# EAGLE board xmegaproto (EAGLE 5.07)
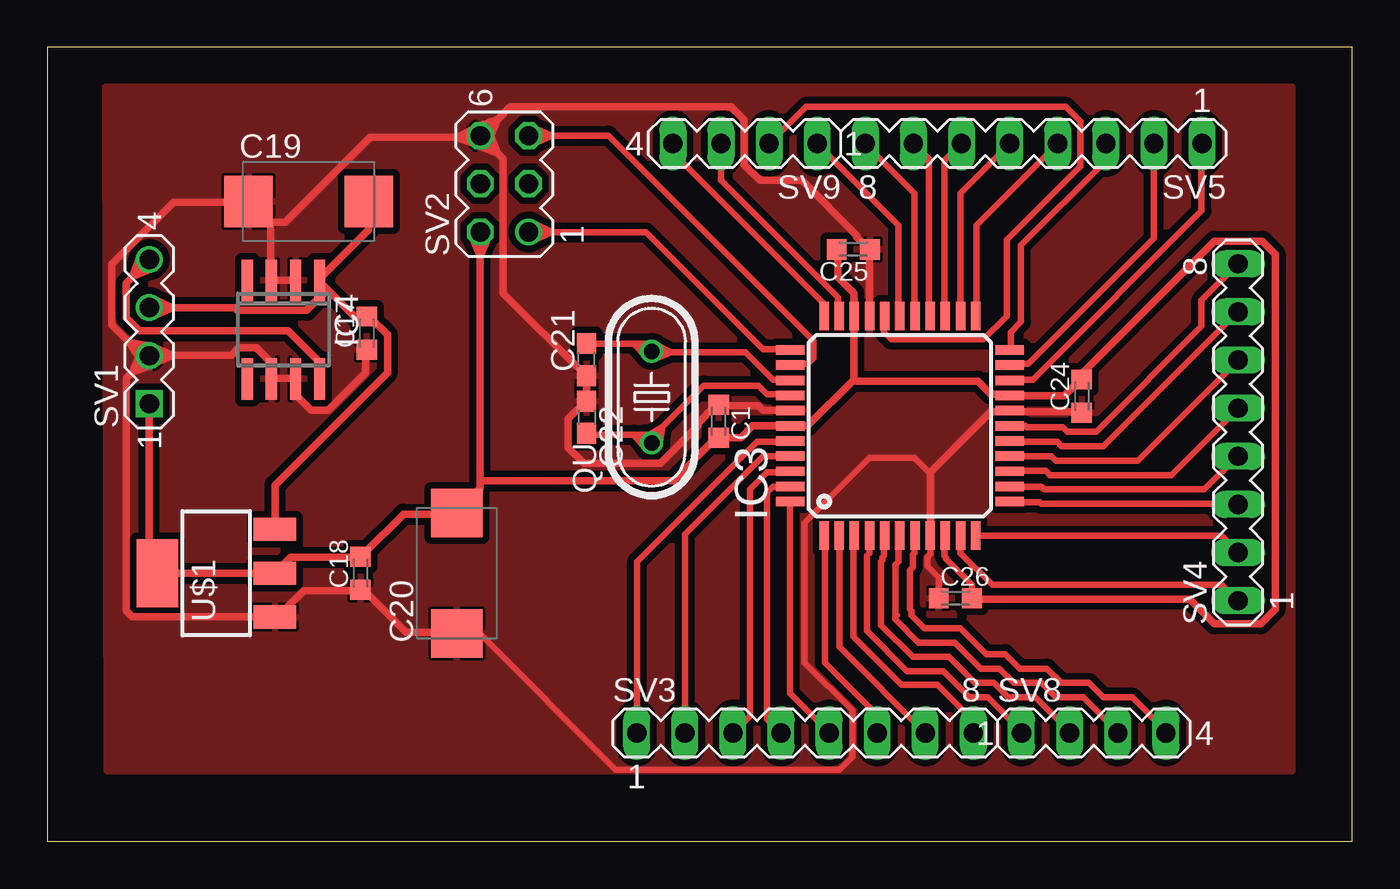
[diagram p0: board, top side]

Size 68.89 x 41.9 mm. Coordinates in mm from the lower left corner, seen from the top.
Outline: 0,0 68.89,0 68.89,41.9 0,41.9 0,0
Copper layers (1*16): Top 0.035mm / dielectric 1.5mm / Bottom 0.035mm
Design rules "hand-Ã¤tzung *": minimum track width 14mil, minimum drill 0.3mm, track to track 14mil, track to pad 11mil, pad to pad 11mil, via to via 14mil, smd to smd 0mil, copper to edge 14mil, drill to drill 14mil, minimum pad ring 0.2mm, minimum via ring 0.15mm, stop-mask expansion 0.15mm, vias tented up to drill 0.5mm, thermal gap 0.15mm
Net classes: 1 Hi-Power: width 1.524 mm; 2 Lo-Power: width 0.406 mm
vRestrict: area 15.2,47.6 to 17.1,49.5

## Footprints (pad centres in the part's own frame; a part is rotated, then mirrored left to right if it is on the bottom)
C0603K = smd 1.05 x 1.08: 1 -0.875,0; 2 0.875,0
D/7343-31R = smd 2.55 x 2.7: + 3.175,0; - -3.175,0
C0603 = smd 1.1 x 1: 1 -0.85,0; 2 0.85,0
TQFP44 = smd 1.5 x 0.5: 1 -5.8,4; 2 -5.8,3.2; 3 -5.8,2.4; 4 -5.8,1.6; 5 -5.8,0.8; 6 -5.8,0; 7 -5.8,-0.8; 8 -5.8,-1.6; 9 -5.8,-2.4; 10 -5.8,-3.2; 11 -5.8,-4; 23 5.8,-4; 24 5.8,-3.2; 25 5.8,-2.4; 26 5.8,-1.6; 27 5.8,-0.8; 28 5.8,0; 29 5.8,0.8; 30 5.8,1.6; 31 5.8,2.4; 32 5.8,3.2; 33 5.8,4 | smd 0.5 x 1.5: 12 -4,-5.8; 13 -3.2,-5.8; 14 -2.4,-5.8; 15 -1.6,-5.8; 16 -0.8,-5.8; 17 0,-5.8; 18 0.8,-5.8; 19 1.6,-5.8; 20 2.4,-5.8; 21 3.2,-5.8; 22 4,-5.8; 34 4,5.8; 35 3.2,5.8; 36 2.4,5.8; 37 1.6,5.8; 38 0.8,5.8; 39 0,5.8; 40 -0.8,5.8; 41 -1.6,5.8; 42 -2.4,5.8; 43 -3.2,5.8; 44 -4,5.8
SO08 = smd 0.6 x 2.2: 1 -1.905,-2.6; 2 -0.635,-2.6; 3 0.635,-2.6; 4 1.905,-2.6; 5 1.905,2.6; 6 0.635,2.6; 7 -0.635,2.6; 8 -1.905,2.6
HC49U-V = drill 0.813 round: 1 -2.413,0; 2 2.413,0
MA04-1 = drill 1.016 square: 1 -3.81,0 | drill 1.016 round: 2 -1.27,0; 3 1.27,0; 4 3.81,0
MA03-2 = drill 1.016 round: 1 -2.54,-1.27 | drill 1.016 octagon: 2 -2.54,1.27; 3 0,-1.27; 4 0,1.27; 5 2.54,-1.27; 6 2.54,1.27
MA08-1 = drill 1.016 long: 1 -8.89,0; 2 -6.35,0; 3 -3.81,0; 4 -1.27,0; 5 1.27,0; 6 3.81,0; 7 6.35,0; 8 8.89,0
MA04-1' = drill 1.016 long: 1 -3.81,0; 2 -1.27,0; 3 1.27,0; 4 3.81,0
SOT223 = smd 1.219 x 2.235: LEFT -2.311,-3.099; MID 0,-3.099; RIGHT 2.311,-3.099 | smd 3.6 x 2.2: TAP 0,3.099

## Placement (x,y rotation side)
C1  100n  [C0603K]  35.43,22.17 270 top
C17  100n  [C0603K]  16.87,26.82 90 top
C18  100n  [C0603K]  16.54,14.15 90 top
C19  100u  [D/7343-31R]  13.79,33.77 0 top
C20  100u  [D/7343-31R]  21.62,14.15 90 top
C21  15p  [C0603]  28.47,25.43 90 top
C22  15p  [C0603]  28.47,22.38 270 top
C24  100n  [C0603K]  54.61,23.5 90 top
C25  100n  [C0603K]  42.55,31.24 180 top
C26  100n  [C0603K]  47.93,12.83 0 top
IC3  AVR_XMEGA_A4_44A  [TQFP44]  45.01,21.93 90 top
IC4  78L05SMD  [SO08]  12.47,27 180 top
QU  30MHz  [HC49U-V]  31.9,23.44 90 top
SV1  [MA04-1]  5.38,26.9 90 top
SV2  PDI  [MA03-2]  24.13,34.7 90 top
SV3  [MA08-1]  40.01,5.72 0 top
SV4  [MA08-1]  62.86,21.59 90 top
SV5  [MA08-1]  52.07,36.83 180 top
SV8  [MA04-1']  55.25,5.72 0 top
SV9  [MA04-1']  36.83,36.83 180 top
U$1  LM1117  [SOT223]  8.92,14.15 90 top

## Library data of the parts
C1 C17-C22 C24-C26 = rcl
IC3 = xmega; BEST: http://shop.embedit.de/product__809.php
IC4 = linear; BEST: Farnell 1087098
QU = crystal
SV1 U$1 = Fabian
SV2-SV5 SV8 SV9 = con-lstb

## Nets
+3V3 [Lo-Power]: C1.2 C18.2 C20.+ C24.2 C25.2 C26.2 IC3.9 IC3.19 IC3.31 IC3.39 SV1.1 SV2.2 U$1.MID U$1.TAP
+12V [Lo-Power]: IC4.8 SV1.4
GND [Lo-Power]: C1.1 C17.1 C18.1 C19.- C20.- C21.1 C22.1 C24.1 C25.1 C26.1 IC3.8 IC3.18 IC3.30 IC3.38 IC4.2 IC4.3 IC4.6 IC4.7 SV1.2 SV2.6 U$1.LEFT
N$4: IC3.40 SV3.1
N$5: IC3.41 SV3.2
N$6: IC3.42 SV3.3
N$7: IC3.43 SV3.4
N$8: IC3.44 SV3.5
N$9: IC3.1 SV3.6
N$10: IC3.2 SV3.7
N$11: IC3.3 SV3.8
N$12: IC3.10 SV4.1
N$13: IC3.11 SV4.2
N$14: IC3.12 SV4.3
N$15: IC3.13 SV4.4
N$16: IC3.14 SV4.5
N$17: IC3.15 SV4.6
N$18: IC3.16 SV4.7
N$19: IC3.17 SV4.8
N$20: IC3.20 SV5.1
N$21: IC3.21 SV5.2
N$22: IC3.22 SV5.3
N$23: IC3.23 SV5.4
N$24: IC3.24 SV5.5
N$25: IC3.25 SV5.6
N$26: IC3.26 SV5.7
N$27: IC3.27 SV5.8
N$28: IC3.7 SV8.4
N$29: IC3.6 SV8.3
N$30: IC3.5 SV8.2
N$31: C21.2 IC3.36 QU.2
N$32: C22.2 IC3.37 QU.1
N$33: IC3.4 SV8.1
N$34: IC3.33 SV9.4
N$36: IC3.32 SV9.3
N$37: IC3.29 SV9.2
N$38: IC3.28 SV9.1
N$42 [Lo-Power]: C17.2 C19.+ IC4.1 SV1.3 U$1.RIGHT
PDI_CLK: IC3.35 SV2.5
PDI_DATA: IC3.34 SV2.1

## Tracks (layer width: path | path; a pad name or v marks a point on that pad's centre or on a via)
+3V3
  Top 0.356: IC3.9 47.37,16.13 47.37,15.06 47.45,14.99 47.45,14.91 48.82,13.54 48.82,13.01 C26.2
  Top 0.406: SV1.1 5.39,14.53 5.77,14.15 U$1.TAP U$1.MID 12.85,14.99 16.51,14.99 C18.2 16.66,15.14 18.8,17.27 21.62,17.27 C20.+ 21.69,17.5 22.84,18.64 22.84,19.02 | 22.84,19.02 22.84,30.89 | 22.84,30.89 22.84,32.13 SV2.2 | C25.2 41.73,31.22 41.73,29.77 42.57,28.93 42.57,27.79 IC3.31 42.57,27.56 42.57,24.36 | 42.57,24.36 40.13,21.92 39.37,21.92 IC3.39 39.14,21.92 37.24,21.92 36.63,21.31 35.48,21.31 C1.2 35.26,21.23 33.05,19.02 22.84,19.02 | C26.2 48.82,12.78 60.33,12.78 61.62,11.48 64.06,11.48 64.82,12.24 64.82,30.99 64.14,31.67 61.62,31.67 54.61,24.66 C24.2 54.46,24.28 53.7,23.52 50.88,23.52 IC3.19 50.65,23.6 49.81,23.6 49.12,24.28 42.72,24.28 42.57,24.36 | 22.84,30.89 23.32,31.95 SV2.2 | 22.84,30.89 22.39,31.97 SV2.2
+12V
  Top 0.406: 4.5,29.8 4.17,29.46 4.17,27.64 4.85,26.95 12.7,26.95 14.38,25.27 IC4.8 | 4.5,29.8 5.39,30.68 SV1.4 | 4.5,29.8 5.58,30.24 SV1.4 | 4.5,29.8 4.91,30.89 SV1.4
GND
  Top 0.356: C26.1 47.07,12.85 47.07,13.92 46.46,14.53 46.46,14.99 46.61,15.14 46.61,15.98 IC3.8 | 46.61,19.48 46.46,19.56 45.77,20.24 43.41,20.24 39.98,16.81 39.98,9.42 42.49,6.91 42.49,4.47 41.81,3.79 30,3.79 22.84,10.95 21.77,10.95 C20.-
  Top 0.406: IC3.38 39.14,22.76 37.77,22.76 37.54,22.99 35.48,22.99 C1.1 35.26,22.99 34.34,22.07 34.34,21.92 32.36,19.94 28.32,19.94 27.48,20.78 27.48,22.3 28.32,23.14 C22.1 C21.1 28.32,24.66 24.05,28.93 24.05,36.02 23.74,36.33 | IC4.2 13.08,29.62 11.86,29.62 IC4.3 11.79,29.77 11.79,32.59 | 11.79,32.59 10.64,33.73 C19.- 10.41,33.73 6.68,33.73 3.4,30.46 3.4,27.25 4.33,26.33 | IC3.30 43.41,27.79 43.41,31.22 C25.1 43.26,31.37 42.72,31.9 42.72,31.98 39.83,34.87 37.62,34.87 36.78,35.71 36.78,38.08 36.09,38.76 24.44,38.76 23.78,38.11 | 23.78,38.11 22.91,37.24 SV2.6 | 21.59,37.16 17.04,37.16 12.55,32.66 11.94,32.66 11.79,32.59 | 21.59,37.16 22.68,37.16 SV2.6 | 23.74,36.33 22.99,37.08 SV2.6 | C24.1 54.61,22.68 50.88,22.68 IC3.18 50.65,22.68 49.81,22.68 46.61,19.48 46.61,16.28 IC3.8 | C20.- 21.62,11.02 18.95,11.02 16.74,13.23 C18.1 16.51,13.23 13.54,13.23 12.17,11.86 12.01,11.86 U$1.LEFT 11.86,11.86 4.47,11.86 4.17,12.17 4.17,24.44 4.47,24.74 | C17.1 16.81,25.88 16.81,24.74 14.83,22.76 13.92,22.76 13.16,23.52 13.16,24.36 IC4.7 12.93,24.44 11.86,24.44 IC4.6 11.79,24.59 11.79,25.27 11.02,26.04 10.11,26.04 9.73,25.65 6.66,25.65 | 6.66,25.65 5.39,25.65 SV1.2 | 4.47,24.74 5.23,25.5 SV1.2 | 4.33,26.33 5.08,25.58 SV1.2 | 23.78,38.11 22.69,37.71 SV2.6 | 23.78,38.11 23.32,37.04 SV2.6 | 21.59,37.16 22.69,36.76 SV2.6 | 21.59,37.16 22.63,37.69 SV2.6 | 23.74,36.33 23.33,37.41 SV2.6 | 23.74,36.33 22.67,36.77 SV2.6 | 6.66,25.65 5.58,26.1 SV1.2 | 6.66,25.65 5.59,25.17 SV1.2 | 4.47,24.74 5.56,25.16 SV1.2 | 4.47,24.74 4.92,25.82 SV1.2 | 4.33,26.33 4.96,25.35 SV1.2 | 4.33,26.33 5.47,26.13 SV1.2
  pour Top: 3.05,39.83 65.74,39.83 65.74,3.71 3.12,3.71
N$4
  Top 0.356: IC3.40 39.14,21.08 37.47,21.08 31.14,14.76 31.14,5.77 SV3.1
N$5
  Top 0.356: IC3.41 39.14,20.32 37.77,20.32 33.66,16.2 SV3.2
N$6
  Top 0.356: IC3.42 39.14,19.48 38,19.48 37.08,18.57 37.08,6.6 SV3.3
N$7
  Top 0.356: IC3.43 39.14,18.72 38.3,18.72 38,18.41 38,6.45 SV3.4
N$8
  Top 0.356: IC3.44 39.22,17.88 39.22,7.82 41.27,5.77 SV3.5
N$9
  Top 0.356: IC3.1 41.05,16.13 41.05,9.42 43.79,6.68 43.79,5.77 SV3.6
N$10
  Top 0.356: IC3.2 41.81,10.26 SV3.7
N$11
  Top 0.356: SV3.8 48.89,6.35 46.99,8.26 45.09,8.26 42.55,10.79 42.55,15.88 IC3.3
N$12
  Top 0.356: IC3.10 48.21,15.22 49.89,13.54 62,13.54 62.84,12.7 SV4.1
N$13
  Top 0.356: IC3.11 49.05,16.13 62,16.13 62.84,15.29 SV4.2
N$14
  Top 0.356: IC3.12 50.88,17.88 52.4,17.88 52.48,17.8 62.84,17.8 SV4.3
N$15
  Top 0.356: IC3.13 50.88,18.72 52.48,18.72 52.63,18.57 61.09,18.57 62.84,20.32 SV4.4
N$16
  Top 0.356: IC3.14 50.88,19.56 52.7,19.56 52.93,19.33 59.33,19.33 SV4.5
N$17
  Top 0.356: IC3.15 50.88,20.32 53.01,20.32 53.24,20.09 57.58,20.09 62.84,25.35 SV4.6
N$18
  Top 0.356: IC3.16 50.88,21.08 53.31,21.08 53.54,20.85 55.75,20.85 62.84,27.94 SV4.7
N$19
  Top 0.356: IC3.17 50.88,21.92 51.64,21.92 51.71,21.84 53.62,21.84 53.85,21.62 55.37,21.62 60.94,27.18 60.94,28.55 SV4.8
N$20
  Top 0.356: IC3.20 50.88,24.36 52.02,24.36 60.94,33.27 60.94,36.78 SV5.1
N$21
  Top 0.356: IC3.21 50.88,25.2 51.79,25.2 58.42,31.83 SV5.2
N$22
  Top 0.356: IC3.22 50.88,25.96 50.88,26.87 51.41,27.41 51.41,31.45 55.83,35.87 55.83,36.78 SV5.3
N$23
  Top 0.356: IC3.23 49.05,27.79 49.05,32.51 53.31,36.78 SV5.4
N$24
  Top 0.356: IC3.24 48.21,27.79 48.21,34.19 50.8,36.78 SV5.5
N$25
  Top 0.356: IC3.25 47.37,27.79 47.37,35.94 SV5.6
N$26
  Top 0.356: IC3.26 46.53,27.79 46.53,36.02 SV5.7
N$27
  Top 0.356: IC3.27 45.77,27.79 45.77,34.19 43.18,36.78 SV5.8
N$28
  Top 0.356: IC3.7 45.77,16.13 45.77,15.22 45.7,15.14 45.7,14.45 45.54,14.3 45.54,12.24 45.62,12.17 45.62,11.94 46.3,11.25 48.21,11.25 49.58,9.88 50.57,9.88 51.33,9.12 52.78,9.12 53.54,8.36 54.99,8.36 55.75,7.6 57.28,7.6 59.11,5.77 SV8.4
N$29
  Top 0.356: IC3.6 45.01,15.75 44.93,15.67 44.93,14.76 44.78,14.61 44.78,12.01 44.86,11.94 44.78,11.86 44.78,11.71 46,10.49 47.9,10.49 49.28,9.12 50.27,9.12 51.03,8.36 52.48,8.36 53.24,7.6 54.69,7.6 56.52,5.77 SV8.3
N$30
  Top 0.356: IC3.5 44.17,16.13 44.17,15.06 44.09,14.99 44.09,14.83 44.02,14.76 44.02,11.4 45.7,9.73 47.6,9.73 48.97,8.36 49.96,8.36 50.72,7.6 52.17,7.6 54,5.77 SV8.2
N$31
  Top 0.356: 30.97,26.26 31.52,26.26 31.9,25.88 QU.2 | 30.97,26.26 C21.2 | 32.92,25.81 32.05,25.81 QU.2 | 32.92,25.81 36.85,25.81 38.3,24.36 39.14,24.36 IC3.36 | 30.97,26.26 31.58,25.57 QU.2 | 30.97,26.26 31.89,26.29 QU.2 | 32.92,25.81 32.1,26.24 QU.2 | 32.92,25.81 32.06,25.46 QU.2
N$32
  Top 0.356: 30.98,21.46 28.47,21.46 C22.2 | 30.98,21.46 31.52,21.46 31.9,21.08 QU.1 | 32.47,21.88 31.9,21.31 QU.1 | 32.47,21.88 34.65,24.05 37.54,24.05 38,23.6 39.14,23.6 IC3.37 | 30.98,21.46 31.57,20.76 QU.1 | 30.98,21.46 31.9,21.46 QU.1 | 32.47,21.88 31.68,21.4 QU.1 | 32.47,21.88 32.33,20.97 QU.1
N$33
  Top 0.356: IC3.4 43.41,15.22 43.26,15.06 43.26,11.1 45.39,8.97 47.3,8.97 48.67,7.6 49.66,7.6 51.49,5.77 SV8.1
N$34
  Top 0.356: IC3.33 40.97,27.79 40.97,28.4 33.05,36.32 33.05,36.78 SV9.4
N$36
  Top 0.356: IC3.32 41.73,27.79 41.73,28.7 35.56,34.87 SV9.3
N$37
  Top 0.356: IC3.29 44.17,27.71 44.17,26.87 44.55,26.49 49.43,26.49 50.65,27.71 50.65,31.75 54.53,35.64 54.53,38 53.77,38.76 40.06,38.76 38.15,36.86 SV9.2
N$38
  Top 0.356: IC3.28 44.93,27.79 44.93,32.51 40.66,36.78 SV9.1
N$42
  Top 0.406: 14.8,29.12 14.38,29.54 IC4.1 14.45,29.77 16.97,32.28 C19.+ | 14.8,29.12 16.2,27.71 16.81,27.71 C17.2 17.04,27.64 17.96,26.72 17.96,24.74 12.01,18.8 U$1.RIGHT | 6.66,28.17 9.88,28.17 10.03,28.02 13.69,28.02 14.8,29.12 | 6.66,28.17 SV1.3 | 6.66,28.17 5.59,28.63 SV1.3 | 6.66,28.17 5.59,27.71 SV1.3
PDI_CLK
  Top 0.356: IC3.35 39.22,25.2 40.13,25.2 40.44,25.5 40.44,26.42 29.62,37.24 26.67,37.24 | SV2.5 26.67,37.24 | 26.67,37.24 25.62,37.72 SV2.5 | 26.67,37.24 25.62,36.76 SV2.5
PDI_DATA
  Top 0.356: 26.67,32.13 25.42,32.13 SV2.1 | 26.67,32.13 31.6,32.13 37.77,25.96 39.14,25.96 IC3.34 | 26.67,32.13 25.63,32.63 SV2.1 | 26.67,32.13 25.61,31.67 SV2.1